# Altium PCB IPG_Rigid.PcbDoc (part 11 of 13)
Units mm, origin at the board's own origin, x right, y up, seen from the top; angles counter-clockwise.
Board outline 69.6 x 90.73 mm, 10 copper layers (TOP, DHOR, DVERT, GND 1, POWER, GND 2, GND 3, AVERT, AHOR, BOT), stack 1.198 mm thick; 745 components, 398 nets, 1997 pads, 2678 vias.
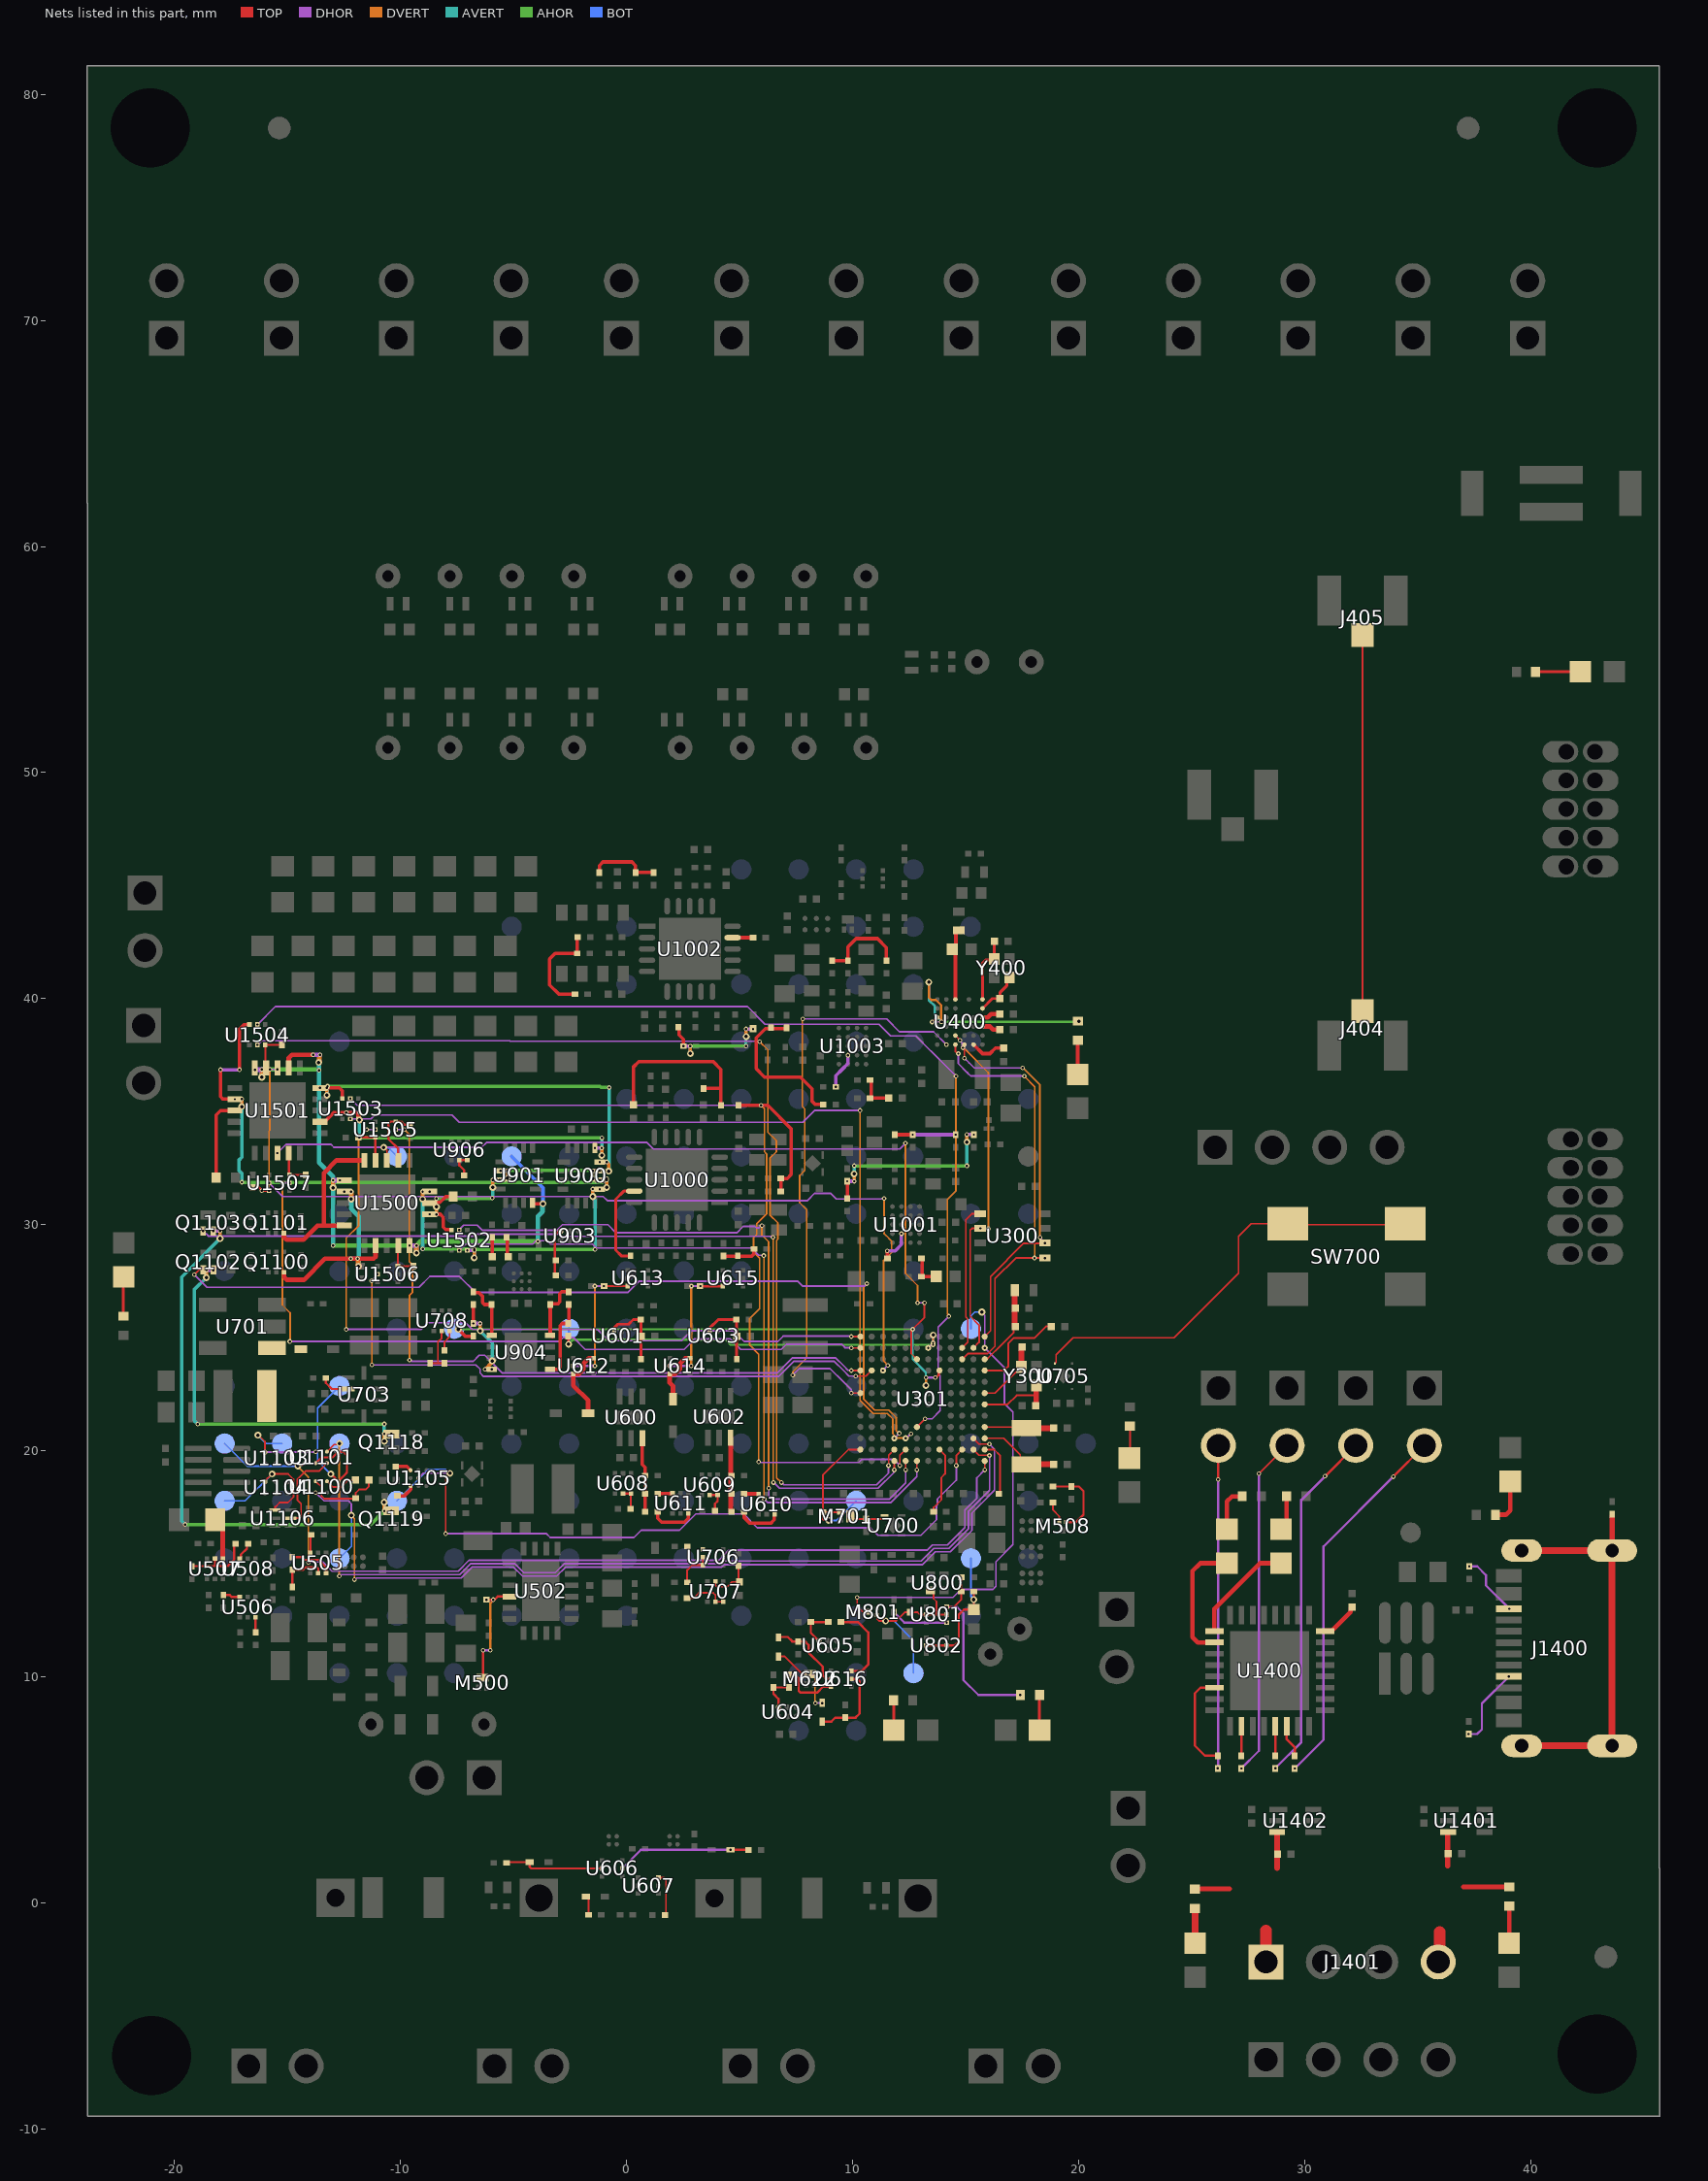
[diagram p15: the nets of this part, all layers, seen from the top]

## Via types
v1: diameter 0.203, hole 0.102, TOP to DHOR, tented top, 561 vias
v2: diameter 0.203, hole 0.102, DHOR to DVERT, tented top, 481 vias
v3: diameter 0.305/0.305/0.305/0.305/0.305/0.305 (per signal layer), hole 0.152, DVERT to AVERT, 397 vias
v4: diameter 0.305/0.305/0/0.305/0.305/0.305 (per signal layer), hole 0.152, DVERT to AVERT, tented top, 283 vias
v5: diameter 0.305/0.305/0.305/0.305/0/0.305/0.305/0.305/0.305/0.305 (per signal layer), hole 0.152, TOP to BOT, 259 vias
v6: diameter 0.305, hole 0.152, TOP to BOT, tented both sides, 169 vias
v7: diameter 0.305/0.305/0.305/0.305/0/0.305/0.305/0.305/0.305/0.305 (per signal layer), hole 0.152, TOP to BOT, tented both sides, 140 vias
v8: diameter 0.203, hole 0.102, AVERT to AHOR, tented top, 101 vias
v9: diameter 0.305/0.305/0.305/0.305/0.305/0.305 (per signal layer), hole 0.152, DVERT to AVERT, tented top, 79 vias
v10: diameter 0.305/0/0/0.305/0/0.305/0.305/0/0/0.305 (per signal layer), hole 0.152, TOP to BOT, tented both sides, 74 vias
v11: diameter 0.305/0.305/0.305/0.305/0.305/0.305/0.305/0.305/0.305/0.305 (per signal layer), hole 0.152, TOP to BOT, tented both sides, 66 vias
v12: diameter 0.203, hole 0.102, AHOR to BOT, tented both sides, 31 vias
v13: diameter 0.203, hole 0.102, DHOR to DVERT, tented both sides, 9 vias
v14: diameter 0.203/0.203 (per signal layer), hole 0.102, DHOR to DVERT, tented top, 7 vias
v15: diameter 0.203/0.203 (per signal layer), hole 0.102, TOP to DHOR, tented top, 7 vias
v16: diameter 0.203, hole 0.102, TOP to DHOR, tented both sides, 5 vias
v17: diameter 0.305, hole 0.152, DVERT to AVERT, tented both sides, 2 vias
v18: diameter 0.305/0.305/0/0.305/0.305/0.305 (per signal layer), hole 0.152, DVERT to AVERT, tented both sides, 2 vias
v19: diameter 0.305, hole 0.152, DVERT to AVERT, tented top, 2 vias
v20: diameter 0.305/0/0/0.305/0.305/0.305/0.305/0/0/0.305 (per signal layer), hole 0.152, TOP to BOT, tented both sides, 1 vias
v21: diameter 0.305/0.305/0/0.305/0.305/0.305 (per signal layer), hole 0.152, DVERT to AVERT, 1 vias
v22: diameter 0.203, hole 0.102, TOP to BOT, tented top, 1 vias

## Nets (pads, with @x,y where several pads share a name; then routed paths per layer and width w, separated by ;. In a path a pad name is that pad's centre, name@x,y a point inside that pad or via, vN(x,y) a via of type N, cw(c..) or ccw(c..) an arc to the next point about the centre after c; other vN are vias at no path point) (continued)
IMP_OUT+: R902.2 TP900.1 U301.J5 | length 24.8
  TOP w0.102: v1(13.666,23.242) 13.683,23.261 13.728,23.261 13.818,23.351 13.818,23.518 U301.J5@13.85,23.55
  TOP w0.152: v7@-7.434,25.366 -7.14,25.072 R902.2@-6.774,25.072
  DVERT w0.102: v4(13.245,22.886) 13.247,22.888 13.247,23.231 v2(13.249,23.232)
  AVERT w0.102: v8@12.663,25.374 12.663,24.053 13.245,23.47 v4(13.245,22.886)
  DHOR w0.102: v2(13.249,23.232) 13.254,23.237 13.66,23.237 v1(13.666,23.242)
  AHOR w0.102: v7(-7.442,25.375) 9.6,25.375 v8(12.663,25.375)
IMP_OUT-: R906.2 TP903.1 U301.L6 | length 18.5
  TOP w0.102: R906.2@-2.574,25.072 -2.574,24.722 v7(-2.565,24.714)
  DVERT w0.102: v2(13.565,24.771) 13.567,24.772 13.567,25.117 v4(13.569,25.119)
  AVERT w0.102: v8(13.564,24.689) 13.566,24.691 13.566,25.052 13.569,25.054 v4(13.569,25.119)
  DHOR w0.102: v1@13.35,24.55 13.563,24.763 v2@13.563,24.769
  AHOR w0.102: v7(-2.565,24.714) -2.361,24.919 4.384,24.919 4.614,24.689 9.6,24.689 v8(13.564,24.689)
  BOT w0.102: v7(-2.565,24.714) -2.569,24.718 -2.553,24.735 -2.553,25.387 TP903.1@-2.54,25.4
  other v1: 13.349,24.544
IMP_SINK: U900.11 U901.10 | length 5.7
  DVERT w0.152: v4(-5.266,32.054) v2(-5.266,32.385) ; v4(-1.487,32.045) v2(-1.487,32.376)
  AVERT w0.152: v4(-5.266,32.054) -5.255,32.066 v8(-5.255,32.41) ; v4@-1.488,32.046 v8(-1.489,32.38)
  DHOR w0.152: v1(-5.572,32.381) v1(-5.572,32.381) -5.27,32.383 v2@-5.268,32.385 ; v2@-1.486,32.376 -1.484,32.374 -1.184,32.374 v1(-1.182,32.372)
  AHOR w0.152: v8(-5.255,32.41) -1.533,32.41 -1.502,32.38 v8(-1.489,32.38)
IPG_SHDN: M701.1 R702.1 TP701.1 U301.B12 | length 6.7
  TOP w0.076: R702.1@8.685,17.272 8.685,16.973 8.729,16.928 8.948,16.928 v7(8.957,16.919) ; R702.1@8.687,17.275 8.687,18.92 9.817,20.05 U301.B12@10.35,20.05 ; R702.1@8.724,17.275 M701.1@9.46,17.275
  BOT w0.076: v7(8.957,16.919) 9.299,16.919 TP701.1@10.16,17.78 TP701.1@10.16,17.772
IREF1: Q1102.2 Q1118.3 | length 17
  DVERT w0.152: v4(-18.591,27.662) v2(-18.591,27.993) ; v4(-10.717,20.423) v2(-10.717,20.754)
  AVERT w0.152: v8(-18.974,21.178) -19.114,21.318 -19.114,27.139 v4(-18.591,27.662) ; v4@-10.718,20.424 v8(-10.719,21.184)
  DHOR w0.152: v2(-18.591,27.993) -18.588,27.991 -18.288,27.991 v1(-18.286,27.989) ; v2(-10.717,20.754) -10.714,20.752 -10.414,20.752 v1(-10.412,20.75)
  AHOR w0.152: v8(-18.974,21.178) -18.971,21.181 -10.722,21.181 v8(-10.719,21.184)
IREF2: Q1103.2 Q1119.3 | length 24.2
  DVERT w0.152: v4(-17.985,29.389) v2(-17.985,29.72) ; v4(-10.723,17.721) -10.72,17.718 -10.72,17.344 v2(-10.717,17.341)
  AVERT w0.152: v8(-19.533,16.739) -19.685,16.891 -19.685,27.689 v4(-17.985,29.389) ; v4(-10.723,17.721) -10.719,17.717 -10.719,17.346 v8(-10.715,17.342)
  DHOR w0.152: v1(-18.29,29.716) -18.288,29.718 -17.988,29.718 v2(-17.985,29.72) ; v2(-10.717,17.341) -10.714,17.343 -10.414,17.343 v1(-10.412,17.345)
  AHOR w0.152: v8(-19.533,16.739) -11.318,16.739 v8(-10.715,17.342)
MAG_DET: M801.3 TP802.1 U301.L1 | length 21.5
  TOP w0.076: v1(10.21,13.513) 10.21,13.107 10.439,12.878 M801.3@10.719,12.878
  DHOR w0.076: v1(10.21,13.513) 14.445,13.513 14.794,13.862 16.205,13.862 16.346,14.003 16.346,15.089 17.101,15.844 17.101,21.705 16.725,22.081 16.725,23.675 v1(15.85,24.55) 15.85,25.8 15.85,25.978 15.723,26.105 v7(15.723,26.137)
  BOT w0.076: TP802.1@15.24,25.4 15.24,25.8 15.24,25.964 15.413,26.137 v7(15.723,26.137)
MAG_OUT: R803.1 R804.1 R805.2 U801.3 | length 8.4
  TOP w0.076: U801.3@14.166,13.101 14.498,13.101 14.808,13.411 R804.1@14.808,14.402
  DHOR w0.102: v1(14.17,13.082) 14.63,13.082 14.91,12.802 14.91,9.855 15.57,9.195 v1(17.424,9.195)
MAG_OUTn: M801.1 R801.2 TP801.1 U800.3 U801.2 U801.5 | length 7.7
  TOP w0.076: M801.1@11.089,12.728 11.089,12.561 11.179,12.471 11.933,12.471 12.314,12.852 R801.2@12.522,12.852 12.523,12.851 12.776,12.851 12.777,12.852 12.878,12.852 12.979,12.751 U801.5@13.266,12.751 13.716,12.751 ; U800.3@13.446,13.828 13.449,13.828 13.586,13.691 13.586,13.458 13.716,13.328 13.716,12.751 ; U801.2@14.166,12.751 13.716,12.751
  BOT w0.076: v7(11.469,12.471) 11.836,12.471 12.7,11.608 TP801.1@12.7,10.16
MUX_ENn: TP1502.1 U301.K7 U1500.18 U1501.18 | length 40.1
  TOP w0.076: v7@-10.744,33.426 v7(-10.742,33.424) -10.6,33.282 U1500.18@-10.6,32.848 ; U301.K7@12.85,24.05 12.601,24.299 12.601,25.312 13.183,25.894 v1(13.183,26.539)
  DVERT w0.076: v2(12.344,33.604) 12.344,27.842 12.878,27.308 v2(12.878,26.543)
  DHOR w0.076: v1(-15.443,33.167) -15.054,33.556 -13.082,33.556 -12.95,33.424 v7(-10.742,33.424) -6.405,33.424 -6.192,33.637 0.907,33.637 1.191,33.353 12.093,33.353 v2(12.344,33.604) ; v2(12.878,26.543) 12.88,26.541 13.181,26.541 v1(13.183,26.539)
  BOT w0.076: v7(-10.742,33.424) -10.724,33.407 -10.547,33.407 TP1502.1@-10.16,33.02
NetA400_1: 
NetC300_2: C300.2 U301.G1 Y300.1 | length 3
  TOP w0.076: U301.G1@15.85,22.55 16.305,22.55 16.6,22.845 17.255,23.5 17.28,23.5 17.465,23.685 Y300.1@17.465,23.71 Y300.1@17.47,23.715
  TOP w0.254: Y300.1@17.47,23.715 C300.2@17.47,24.6
NetC301_1: C301.1 U301.F1 Y300.3 | length 3.2
  TOP w0.076: U301.F1@15.85,22.05 16.861,22.05 17.261,22.45 18.13,22.45
  TOP w0.254: C301.1@18.13,22 18.13,22.45 Y300.3@18.13,22.799
NetC305_2: C305.2 U301.D1 Y301.2 | length 3
  TOP w0.076: U301.D1@15.85,21.05 16.6,21.05 17.65,21.05 Y301.2@17.7,21
  TOP w0.254: Y301.2@17.7,21 C305.2@18.87,21
NetC306_2: C306.2 U301.C1 Y301.1 | length 3.6
  TOP w0.076: U301.C1@15.85,20.55 16.6,20.55 16.686,20.55 17.417,19.82 17.417,19.683 Y301.1@17.7,19.4
  TOP w0.254: Y301.1@17.7,19.4 C306.2@18.87,19.4
NetC311_2: C311.2 U301.J1 | length 4.4
  TOP w0.076: U301.J1@15.85,23.55 16.367,23.55 16.6,23.55 16.712,23.55 16.888,23.726 16.888,24.738 17.14,24.99 18.056,24.99 18.566,25.5 C311.2@18.8,25.5
NetC317_1: C317.1 C318.2 L301.2 U301.K1 | length 3.8
  TOP w0.076: U301.K1@15.85,24.05 15.89,24.09 15.99,24.09 16.6,24.7 17.135,25.235 17.135,25.465 C318.2@17.17,25.5 ; L301.2@17.17,27.065 L301.2@17.205,27.1 ; L301.2@17.17,27.065 L301.2@17.205,27.1 ; L301.2@17.17,27.065 L301.2@17.205,27.1
  TOP w0.254: C318.2@17.17,25.5 17.17,26.3 L301.2@17.17,27.065
NetC400_1: C400.1 U400.A1 Y400.1 | length 3
  TOP w0.127: U400.A1@15.753,39.968 15.753,41.573 15.89,41.711 16.226,41.711 Y400.1@16.277,41.761 16.277,42.461 C400.1@16.31,42.494
NetC401_2: C401.2 L400.1 U400.E1 | length 3.2
  TOP w0.084: C401.2@14.553,42.045 C401.2@14.409,42.189 C401.2@14.572,42.352 ; L400.1@14.572,42.886 14.705,43.019 L400.1@14.707,43.019
  TOP w0.17: U400.E1@14.553,39.968 14.553,40.208 C401.2@14.553,42.045 ; C401.2@14.572,42.352 L400.1@14.572,42.886
NetC403_1: C403.1 U400.A2 Y400.3 | length 2.1
  TOP w0.127: U400.A2@15.753,39.568 16.19,40.005 C403.1@16.52,40.005 16.537,40.022 16.537,40.281 16.821,40.565 16.821,40.815 Y400.3@16.947,40.941
NetC408_2: C408.2 U400.B6 | length 1.6
  TOP w0.152: U400.B6@15.353,37.968 15.753,37.568 16.079,37.568 16.327,37.816 C408.2@16.688,37.816
NetC409_2: C409.2 U400.A3 | length 0.8
  TOP w0.203: U400.A3@15.753,39.168 15.976,39.168 16.128,39.319 C409.2@16.52,39.319
NetC410_1: C410.1 U400.A4 | length 0.9
  TOP w0.203: U400.A4@15.753,38.768 U400.A4@15.825,38.768 ; U400.A4@15.776,38.768 15.983,38.768 16.08,38.768 16.215,38.633 C410.1@16.52,38.633
NetC602_2: C602.2 R607.1 R610.2 U601.A2 | length 3.3
  TOP w0.076: R607.1@0.635,24.054 R607.1@0.635,24.105
  TOP w0.127: U601.A2@-0.552,25.262 -0.552,25.423 -0.375,25.6 0.091,25.6 0.297,25.806 R610.2@0.634,25.806 0.635,25.069 R607.1@0.635,24.105
NetC605_2: C605.2 R621.1 R622.2 U603.A2 | length 3.3
  TOP w0.076: R621.1@4.797,24.058 R621.1@4.797,24.108
  TOP w0.127: U603.A2@3.681,25.262 3.681,25.423 4.064,25.806 4.867,25.806 4.867,25.069 R621.1@4.867,24.105
NetC709_2: C709.2 R710.2 U707.2 | length 2.1
  TOP w0.076: U707.2@3.933,14.217 3.933,14.041 3.978,13.997 4.472,13.997 4.674,14.199 C709.2@4.999,14.199 4.999,14.317 4.957,14.317 4.953,14.32 R710.2@4.953,14.911
NetC904_2: C904.2 R909.1 | length 0.9
  TOP w0.152: C904.2@-5.944,28.575 R909.1@-5.944,29.438
NetC905_2: C905.2 R911.1 | length 0.9
  TOP w0.152: R911.1@-5.309,29.438 -5.268,29.398 -5.268,28.616 C905.2@-5.228,28.575
NetC1011_1: C1011.1 R1025.2 R1026.1 | length 8.1
  TOP w0.152: C1011.1@0.301,35.32 0.301,36.97 0.542,37.211 3.84,37.211 4.18,36.872 4.18,36.025 ; R1025.2@3.404,36.025 4.18,36.025 ; R1026.1@4.18,35.315 4.18,35.325 4.18,36.025
NetC1012_2: C1012.2 R1023.2 R1024.1 | length 1.5
  TOP w0.152: R1024.1@13.079,28.491 R1024.1@13.092,28.479 ; C1012.2@13.697,27.704 13.092,27.704 R1024.1@13.092,28.479 ; R1024.1@13.067,28.504 R1024.1@13.092,28.479 ; R1024.1@13.067,28.504 R1024.1@13.092,28.479 ; R1024.1@13.067,28.504 R1024.1@13.092,28.479
NetC1026_2: C1026.2 R1054.2 R1055.1 | length 1.6
  TOP w0.152: R1055.1@10.825,36.4 10.825,35.6 11.57,35.6 C1026.2@11.6,35.6
NetC1027_1: C1027.1 R1056.2 R1057.1 | length 5.4
  TOP w0.152: R1057.1@2.3,38.734 2.322,38.712 2.322,38.394 2.52,38.196 v1(2.52,37.9)
  DVERT w0.152: v4(2.825,37.573) v2(2.825,37.904) ; v4(5.295,38.328) v2(5.295,38.659)
  AVERT w0.152: v4(2.825,37.573) 2.827,37.575 2.827,37.901 v8(2.829,37.903) ; v8(5.295,37.897) v4(5.295,38.328)
  DHOR w0.152: v1(2.52,37.9) 2.522,37.902 v2@2.822,37.902 ; v2(5.295,38.659) 5.298,38.657 5.598,38.657 v1(5.6,38.655)
  AHOR w0.152: v8(2.829,37.903) 2.833,37.9 5.292,37.9 v8(5.295,37.897)
NetC1402_2: C1402.2 U1400.16 | length 1.7
  TOP w0.2: U1400.16@30.912,12.02 30.939,12.047 31.227,12.047 32.046,12.866 32.046,13.026 C1402.2@32.106,13.086
NetC1404_1: C1404.1 J1401.4 R1407.1 U1401.3 | length 4.9
  TOP w0.2: U1401.3@36.335,3.107 U1401.3@36.36,3.132 ; 37.033,0.704 R1407.1@39.056,0.704
  TOP w0.254: 36.335,1.639 U1401.3@36.335,3.107
  TOP w0.5: J1401.4@35.979,-2.68 35.979,-1.283
NetC1406_2: C1406.2 J1401.1 R1408.1 U1402.3 | length 4.5
  TOP w0.2: R1408.1@25.156,0.603 R1408.1@25.172,0.619 ; R1408.1@25.188,0.635 R1408.1@25.172,0.619 ; 26.695,0.619 R1408.1@25.172,0.619
  TOP w0.254: 28.78,1.548 U1402.3@28.78,3.129
  TOP w0.5: J1401.1@28.296,-2.616 28.296,-1.219
NetD400_A: D401.A R401.1 | length 2
  TOP w0.127: R401.1@40.227,54.458 D401.A@42.201,54.458
NetD401_A: D402.A R402.2 | length 1.5
  TOP w0.152: D402.A@19.964,36.654 R402.2@19.964,38.158
NetD600_2: D600.2 U612.3 U612.6 | length 3.5
  TOP w0.076: D600.2@-1.698,21.666 -1.523,21.666 D600.2@-1.503,21.686
  TOP w0.203: D600.2@-1.698,21.666 -1.698,22.221 -2.355,22.878 U612.3@-2.355,23.399 -2.353,23.397 -2.126,23.397 -1.905,23.618 -1.905,23.866 -1.672,24.099 U612.6@-1.455,24.099
NetD601_2: D601.2 R609.2 U606.5 | length 4.5
  TOP w0.1: R609.2@-5.31,1.767 -5.274,1.803 D601.2@-4.281,1.803 -4.281,1.583 -4.222,1.524 U606.5@-1.085,1.524
NetD602_2: D602.2 U614.3 U614.6 | length 2.5
  TOP w0.203: D602.2@2.057,22.28 2.057,22.866 1.912,23.011 U614.3@1.912,23.399 1.914,23.397 2.141,23.397 2.362,23.618 2.362,23.866 2.595,24.099 U614.6@2.812,24.099
NetD603_2: D603.2 R615.2 U606.2 | length 6.1
  TOP w0.1: D603.2@4.608,2.341 5.305,2.341 5.361,2.285 5.396,2.32 R615.2@5.396,2.337 R615.2@5.331,2.403
  DHOR w0.1: v1(-0.185,1.524) 0.635,2.344 v1(4.608,2.344)
NetD604_1: D604.1 R623.1 | length 0.9
  TOP w0.102: D604.1@-1.792,0.279 -1.754,0.279 -1.68,0.205 R623.1@-1.68,-0.529
NetD605_1: D605.1 D606.1 M622.3 | length 3.7
  TOP w0.076: D606.1@6.73,10.899 7.008,10.899 7.787,10.12 M622.3@8.049,10.12 ; v1(8.038,10.13) M622.3@8.049,10.12 ; M622.3@8.128,10.12 M622.3@8.049,10.12 ; v1(8.661,8.839) D605.1@8.661,8.859
  DVERT w0.076: v2(8.356,8.838) 8.336,8.859 8.336,10.055 8.37,10.09 v2(8.37,10.124)
  DHOR w0.076: v1(8.038,10.13) 8.041,10.127 8.367,10.127 v2(8.37,10.124) ; v2(8.356,8.838) v1(8.661,8.839)
NetD605_2: D605.2 R625.2 U616.5 | length 3.6
  TOP w0.076: U616.5@9.95,9.912 10.05,9.912
  TOP w0.102: D605.2@8.661,8.019 9.061,8.019 9.236,8.195 R625.2@9.677,8.195 10.135,8.195 10.312,8.373 10.312,9.804 10.204,9.912 10.05,9.912
NetD606_2: D606.2 R628.2 U616.2 | length 3.5
  TOP w0.102: D606.2@6.73,11.739 6.752,11.76 7.137,11.76 7.335,11.563 R628.2@7.597,11.563 7.897,11.563 8.052,11.408 8.052,11.074 8.687,10.439 8.687,10.046 8.789,9.944 8.821,9.912 U616.2@9.05,9.912
NetD700_2: D700.2 L700.2 U701.1
NetD701_A: D704.A R714.2 | length 1.3
  TOP w0.127: D704.A@11.818,7.645 R714.2@11.818,8.966
NetD702_A: D705.A R715.1 | length 1.7
  TOP w0.127: R715.1@-22.258,25.952 D705.A@-22.258,27.691
NetD704_A: D301.A R304.1 | length 1.4
  TOP w0.076: D301.A@22.28,19.7 R304.1@22.28,21.093
NetD802_A: D802.A R805.1 | length 1.5
  TOP w0.127: D802.A@18.274,7.647 R805.1@18.274,9.195
NetD1400_A: D1400.A R1400.2 | length 2
  TOP w0.203: R1400.2@38.449,17.17 38.913,17.17 39.106,17.364 D1400.A@39.106,18.642
NetD1401_A: D1401.A R1407.2 | length 1.6
  TOP w0.2: D1401.A@39.056,-1.786 R1407.2@39.056,-0.146
NetD1402_A: D1402.A R1408.2 | length 1.5
  TOP w0.3: D1402.A@25.156,-1.786 R1408.2@25.156,-0.247
NetD1404_A: D1404.A R1403.1 | length 1.6
  TOP w0.2: D1404.A@28.956,16.523 29.21,16.777 R1403.1@29.21,17.988
NetD1404_K: D1404.K U1400.25 | length 4.8
  TOP w0.2: U1400.25@26.01,12.02 26.01,13.005 28.028,15.023 D1404.K@28.956,15.023
NetD1405_A: D1405.A R1411.1 | length 2
  TOP w0.2: D1405.A@26.568,16.523 26.568,17.76 26.792,17.983 27.238,17.983 R1411.1@27.242,17.988
NetD1405_K: D1405.K U1400.26 | length 5.7
  TOP w0.2: U1400.26@26.01,11.52 25.285,11.52 25.044,11.76 25.044,14.681 25.387,15.023 D1405.K@26.568,15.023
NetJ404_1: J404.1 J405.1 | length 16.6
  TOP w0.084: J404.1@32.563,39.447 J405.1@32.563,56.087
NetJ1400_1: J1400.1 J1400.2 J1400.3 J1400.4 R1410.1 | length 18.2
  TOP w0.25: J1400.4@43.612,15.585 R1410.1@43.612,17.11
  TOP w0.3: J1400.1@39.612,6.945 J1400.3@43.612,6.945 J1400.4@43.612,15.585 43.546,15.585 43.536,15.596 43.525,15.585 J1400.2@39.612,15.585
NetJ1400_A5: J1400.A5 R1405.1 | length 3.5
  TOP w0.102: v1(39.037,10.008) J1400.A5@39.037,10.013
  DHOR w0.102: v1(37.262,7.467) 37.638,7.467 37.846,7.675 37.846,8.816 v1(39.037,10.008)
NetJ1400_B5: J1400.B5 R1409.1 | length 2.9
  TOP w0.2: J1400.B5@39.037,13.013 39.057,13.013 v1(39.065,13.005)
  DHOR w0.102: v1(37.287,14.885) 37.642,14.885 38.024,14.503 38.024,14.046 v1(39.065,13.005)
NetJP1400_2: JP1400.2 R1401.1 | length 15.1
  TOP w0.102: v1(27.982,18.987) JP1400.2@29.227,20.231
  DHOR w0.102: v1(27.203,5.947) 27.982,6.725 v1(27.982,18.987)
NetJP1401_2: JP1401.2 R1404.1 | length 15.8
  TOP w0.102: R1404.1@28.702,5.947 28.702,5.96 28.706,5.965 v1(28.706,5.955) ; v1(30.91,18.874) JP1401.2@32.266,20.231
  DHOR w0.102: v1(28.706,5.955) 29.855,7.103 29.855,17.82 v1(30.91,18.874)
NetJP1402_2: JP1402.2 R1402.1 | length 14.3
  TOP w0.102: v1(26.175,18.732) 26.181,18.739 26.181,20.225 JP1402.2@26.187,20.231
  DHOR w0.102: v1(26.162,5.947) 26.175,5.96 v1(26.175,18.732)
NetJP1403_2: JP1403.2 R1406.1 | length 16.7
  TOP w0.102: R1406.1@29.566,5.947 29.566,5.938 v1(29.573,5.946) ; v1(33.926,18.851) JP1403.2@35.306,20.231
  DHOR w0.102: v1(29.573,5.946) 30.836,7.208 30.836,15.761 v1(33.926,18.851)
NetM500_3: M500.3 R522.2 U502.4 | length 5.2
  TOP w0.102: M500.3@-6.375,9.961 -6.35,9.987 v1(-6.35,11.176) ; v1(-6.197,13.411) -5.84,13.411 -5.701,13.55 U502.4@-5.175,13.55
  DVERT w0.102: v2(-6.02,11.176) -6.02,13.258 -5.893,13.385 v2@-5.893,13.411
  DHOR w0.102: v1(-6.35,11.176) v2(-6.02,11.176) ; v1(-6.197,13.411) v2@-5.893,13.411
  other v2: -5.891,13.411
NetM508_1: M508.1 R515.2 R517.1 | length 3.4
  TOP w0.1: R515.2@18.873,18.415 R517.1@19.685,18.416 20.015,18.415 20.218,18.212 20.218,17.17 19.892,16.844 M508.1@19.449,16.844
NetM508_2: M508.2 R516.1 | length 1
  TOP w0.076: R516.1@18.873,17.704 18.873,17.373 19.149,17.096 M508.2@19.149,16.844
NetM701_3: M701.3 R700.1 U700.3 | length 1.5
  TOP w0.102: M701.3@9.905,17.1 10.025,16.98 R700.1@10.6,16.98 11.362,16.98
NetR301_2: R301.2 U301.B5 | length 3.1
  TOP w0.076: R301.2@13.588,17.297 13.588,17.49 13.931,17.833 13.931,18.8 13.931,18.813 14.099,18.981 14.099,19.801 U301.B5@13.85,20.05
NetR302_1: R302.1 U301.B1 | length 2.5
  TOP w0.076: U301.B1@15.85,20.05 16.272,20.05 16.525,19.797 16.525,18.8 R302.1@16.525,18.1
NetR403_1: R402.1 U400.G3 | length 10.8
  TOP w0.076: v1(13.523,38.968) 13.723,39.168 U400.G3@13.752,39.168
  DVERT w0.102: v18(13.378,40.733) 13.378,40.048 13.478,39.948 13.683,39.948 13.917,39.714 13.917,39.247 v2(13.917,38.972)
  AVERT w0.102: v18(13.378,40.733) 13.378,39.937 13.647,39.668 13.647,39.296 v8(13.966,38.977)
  DHOR w0.076: v1@13.527,38.972 v2(13.917,38.972)
  AHOR w0.102: v8(13.966,38.977) v7@19.978,38.977
  other v7: 20.015,38.989
NetR500_2: R500.2 R504.1 U505.5 | length 2.2
  TOP w0.1: R504.1@-14.783,14.731 -14.324,14.731 -14.216,14.839 -13.698,14.839 -13.64,14.781 U505.5@-13.64,14.587
  TOP w0.102: R500.2@-14.783,13.971 R504.1@-14.783,14.731
NetR501_2: R501.2 R507.1 U507.5 | length 3.1
  TOP w0.102: R501.2@-19.228,14.891 -19.228,14.896 -18.212,14.896 ; U507.5@-18.212,15.233 -18.212,14.896 ; R507.1@-17.294,15.951 -17.358,15.887 -17.358,15.184 -17.647,14.896 -18.212,14.896
NetR502_2: R502.2 U507.4 | length 1.8
  TOP w0.102: R502.2@-18.199,16.942 R502.2@-17.862,16.604
  TOP w0.203: U507.4@-17.862,15.233 R502.2@-17.862,16.604
NetR503_2: R503.2 U506.3 | length 0.7
  TOP w0.102: R503.2@-17.831,13.615 -17.553,13.615 -17.476,13.538 U506.3@-17.117,13.538
NetR504_2: R504.2 U505.6 | length 2
  TOP w0.102: R504.2@-14.783,15.291 -14.773,15.291 -14.715,15.233 -14.715,15.284 -14.709,15.291 -14.364,15.291 -14.246,15.173 -13.624,15.173 -13.29,14.839 U505.6@-13.29,14.587
NetR505_2: R505.2 U506.6 | length 0.7
  TOP w0.102: U506.6@-16.417,12.638 -16.417,11.972 R505.2@-16.408,11.964
NetR506_1: R506.1 U505.3 | length 0.7
  TOP w0.102: U505.3@-13.99,15.487 -13.98,15.496 -13.98,16.17 R506.1@-13.971,16.18
NetR507_2: R507.2 U508.6 | length 0.8
  TOP w0.076: R507.2@-16.764,15.861 R507.2@-16.734,15.891
  TOP w0.102: U508.6@-17.114,15.233 -17.114,15.235 -17.067,15.282 -17.067,15.398 -16.792,15.673 -16.792,15.834 R507.2@-16.764,15.861
NetR600_2: R600.2 U608.5 U608.6 | length 1.1
  TOP w0.102: U608.5@-0.125,18.123 -0.125,18.121 -0.104,18.1 U608.6@0.197,18.1 ; U608.6@0.193,18.096 0.193,17.459 R600.2@0.227,17.425
  TOP w0.127: U608.5@-0.153,18.1 -0.148,18.1 U608.5@-0.125,18.123
NetR602_2: R602.2 U612.2 U613.3 | length 5.8
  TOP w0.102: R602.2@-0.88,27.285 U613.3@0.058,27.285
  DVERT w0.102: v2(-1.4,23.749) -1.398,23.751 -1.398,27.281 v2(-1.396,27.283)
  DHOR w0.102: v1(-2.355,23.749) v2(-1.4,23.749) ; v2(-1.396,27.283) -1.395,27.284 -0.996,27.284 v1(-0.995,27.285)
NetR604_1: R604.1 R605.1 R606.1 U600.6 | length 3.3
  TOP w0.152: U600.6@0.7,20.55 0.7,19.391 0.82,19.271 R604.1@0.82,18.9 R606.1@0.82,18.1 R605.1@0.82,17.3
NetR605_2: R605.2 U611.3 | length 2
  TOP w0.152: R605.2@1.38,17.3 1.38,17.01 1.549,16.84 2.561,16.84 2.734,17.013 2.734,17.225 U611.3@2.738,17.228
NetR606_2: R606.2 U611.6 | length 0.7
  TOP w0.152: R606.2@1.387,18.107 2.017,18.107 U611.6@2.038,18.128
NetR611_2: R611.2 U609.5 U609.6 | length 1.1
  TOP w0.102: U609.5@3.705,18.041 U609.6@4.033,18.041 4.033,17.774 3.912,17.654 R611.2@3.912,17.348
  TOP w0.152: U609.5@3.683,18.041 U609.5@3.705,18.041
NetR613_2: R613.2 U614.2 U615.3 | length 5.8
  TOP w0.102: R613.2@3.365,27.279 U615.3@4.303,27.279
  DVERT w0.102: v2(2.867,23.749) 2.869,23.751 2.869,27.281 v2(2.872,27.283)
  DHOR w0.102: v1(1.912,23.749) v2(2.867,23.749) ; v2(2.872,27.283) 2.873,27.284 3.272,27.284 v1(3.273,27.285)
NetR617_1: R617.1 R618.1 R619.1 U602.6 | length 3.3
  TOP w0.2: U602.6@4.6,20.575 4.61,20.565 4.61,17.31 R618.1@4.62,17.3
NetR618_2: R618.2 U610.3 | length 2
  TOP w0.152: R618.2@5.18,17.3 5.212,17.268 5.212,17.043 5.465,16.789 6.379,16.789 6.532,16.942 6.532,17.173 U610.3@6.551,17.192
NetR619_2: R619.2 U610.6 | length 0.7
  TOP w0.152: R619.2@5.18,18.1 5.184,18.096 5.847,18.096 U610.6@5.851,18.092
NetR620_1: R620.1 U607.6 | length 1.9
  TOP w0.076: U607.6@1.415,1.112 1.657,1.112 1.749,1.021 1.749,-0.487 R620.1@1.702,-0.533
NetR626_1: R626.1 U616.3 | length 2.7
  TOP w0.102: R626.1@7.217,10.12 R626.1@7.188,10.091 7.461,10.091 7.518,10.033 7.62,9.931 7.62,9.386 7.709,9.296 8.433,9.296 8.699,9.562 U616.3@9.05,9.562
NetR626_2: R626.2 R627.1 U604.C1 | length 1.7
  TOP w0.102: U604.C1@6.73,8.645 6.73,9.018 6.502,9.246 R627.1@6.502,9.531 R626.2@7.188,9.531
NetR629_1: R629.1 U616.6 | length 3.8
  TOP w0.102: R629.1@9.601,12.421 9.487,12.421 R629.1@9.484,12.423 10.233,12.423 10.693,11.963 10.693,10.541 10.414,10.262 U616.6@9.95,10.262
NetR629_2: R629.2 R630.1 U605.C1 | length 1.8
  TOP w0.076: U605.C1@8.48,11.582 U605.C1@8.515,11.582
  TOP w0.102: U605.C1@8.48,11.582 8.48,11.618 8.154,11.944 R630.1@8.154,12.423 R629.2@8.924,12.423
NetR701_2: R701.2 U706.4
NetR703_2: R703.2 R705.1 U708.5 | length 2.1
  TOP w0.076: R703.2@-8.687,23.875 -8.341,23.875 ; U708.5@-8.179,25.306 -8.179,24.981 -8.341,24.819 -8.341,23.875 ; R705.1@-8.051,23.875 -8.341,23.875
NetR704_2: R704.2 U706.5 U706.6 | length 1.7
  TOP w0.076: R704.2@2.686,14.175 2.686,14.719 2.908,14.941 U706.6@3.383,14.941 U706.5@3.383,15.291
NetR705_2: R705.2 U708.6 | length 1
  TOP w0.076: R705.2@-8.051,24.435 -8.051,24.816 -7.829,25.038 U708.6@-7.829,25.306
NetR709_2: R709.2 U707.5 U707.6 | length 2
  TOP w0.076: R709.2@2.68,13.48 2.965,13.48 3.2,13.716 3.835,13.716 3.933,13.618 U707.5@3.933,13.317 U707.6@4.283,13.317
NetR711_1: R711.1 U703.7 | length 1.3
  TOP w0.1: R711.1@-13.301,23.218 -13.301,23.001 -13.034,22.734 U703.7@-12.316,22.734
NetR800_2: R800.2 U801.1 | length 2.5
  DHOR w0.102: v1(11.836,12.852) 12.287,12.401 v1(14.166,12.401)
NetR900_2: R900.2 R901.1 U904.1 | length 2.5
  TOP w0.152: R901.1@-6.774,27.032 -6.732,26.99 -6.527,26.99 -6.374,26.837 -6.374,26.558 -6.284,26.469 -6.022,26.469 -5.966,26.412 -5.959,26.412 U904.1@-5.959,25.102
NetR901_2: R901.2 R902.1 U904.4 | length 3.7
  TOP w0.152: R902.1@-6.774,25.677 R901.2@-6.774,26.427
  DVERT w0.152: v4(-6.471,25.303) v2(-6.471,25.634) ; v2(-6.262,23.6) -5.97,23.892 -5.97,23.948 v4(-5.941,23.977)
  AVERT w0.152: v4(-6.471,25.303) -5.941,24.774 v4(-5.941,23.977)
  DHOR w0.152: v1(-6.776,25.63) v1(-6.776,25.63) -6.474,25.632 v2@-6.472,25.634 ; v2(-6.262,23.6) -6.258,23.602 -5.959,23.602 v1(-5.957,23.604)
NetR906_1: R906.1 R908.2 U904.5 | length 3.6
  TOP w0.076: R906.1@-2.574,25.632 R906.1@-2.552,25.654
  TOP w0.152: U904.5@-3.389,23.602 -3.38,23.611 -3.029,23.611 -2.94,23.7 -2.94,25.53 -2.838,25.632 R906.1@-2.574,25.632 ; R906.1@-2.552,25.654 R908.2@-2.552,26.472
NetR907_2: R907.2 R908.1 U904.8 | length 3
  TOP w0.152: R908.1@-2.574,27.032 -2.603,27.032 -2.861,27.032 -2.948,26.945 -2.948,26.588 -3.044,26.492 -3.374,26.492 -3.374,26.427 U904.8@-3.374,25.152 ; U904.8@-3.374,25.152 U904.8@-3.274,25.052 ; U904.8@-3.374,25.152 U904.8@-3.274,25.052 ; U904.8@-3.374,25.152 U904.8@-3.274,25.052
NetR913_1: R913.1 R914.1 U903.C1 | length 2.2
  TOP w0.102: R913.1@-3.129,27.762 -3.175,27.808 -3.175,28.377 R914.1@-3.129,28.423 -3.172,28.465 -3.172,29.547 -3.007,29.712 U903.C1@-2.915,29.712
NetR915_2: R915.2 U906.5 U906.6 | length 1.1
  TOP w0.102: R915.2@-7.185,32.182 -7.185,32.411 -7.395,32.62 U906.5@-7.395,32.849 U906.6@-7.045,32.849
NetR1002_1: R1002.1 R1005.2 R1007.2 | length 1.5
  TOP w0.152: R1002.1@4.296,28.613 5.549,28.613 5.638,28.703 R1005.2@5.638,28.843
NetR1004_2: R1004.2 R1006.2 R1009.1 | length 8.5
  TOP w0.152: R1004.2@9.767,31.161 9.767,31.127 9.779,31.115 9.779,31.911 v1(9.767,31.924)
  DVERT w0.152: v2(10.072,31.92) v4(10.072,32.251) ; v4(15.062,33.657) v2(15.062,33.988)
  AVERT w0.152: v4(10.072,32.251) 10.073,32.252 10.073,32.607 v8(10.074,32.608) ; v4(15.062,33.657) 15.063,33.655 v8(15.065,32.605) v8(15.065,32.605)
  DHOR w0.152: v1(9.767,31.924) 9.769,31.922 10.068,31.922 v2(10.072,31.92) ; v2(15.062,33.988) 15.065,33.986 15.365,33.986 v1(15.367,33.984)
  AHOR w0.152: v8(10.074,32.608) 10.075,32.607 v8(15.065,32.605) v8(15.065,32.605)
NetR1013_1: R1013.1 U1001.B2 | length 1.6
  TOP w0.152: v1(11.543,28.846) 11.545,28.844 11.545,28.506 R1013.1@11.547,28.504
  DHOR w0.152: v1(11.543,28.846) 11.889,28.846 12.167,29.124 v1(12.167,29.604)
NetR1014_1: R1014.1 U1000.14 | length 4
  TOP w0.127: R1014.1@0.178,28.625 -0.233,28.625 -0.48,28.873 -0.48,31.123 -0.117,31.487 U1000.14@0.342,31.487
NetR1016_2: R1016.2 R1017.2 R1021.1 | length 5.9
  TOP w0.152: R1021.1@4.96,35.28 6.254,35.28 7.29,34.244 7.29,32.225 7.111,32.046 R1016.2@6.827,32.046 R1017.2@6.827,31.465
NetR1019_2: R1019.2 R1020.2 R1022.1 | length 2.7
  TOP w0.152: R1020.2@11.867,33.984 v1(12.667,33.984)
  DHOR w0.152: v1(12.667,33.984) v1(14.567,33.984)
NetR1034_1: R1034.1 R1036.2 R1038.2 | length 3.1
  TOP w0.152: R1036.2@-1.2,45.625 -1.2,45.888 -1.038,46.05 0.245,46.05 0.4,45.895 R1038.2@0.4,45.625 ; R1038.2@0.4,45.58 R1034.1@1.2,45.58
NetR1035_1: R1035.1 R1037.2 R1040.2 | length 6.8
  TOP w0.152: R1040.2@7.073,38.675 6.145,38.675 5.74,38.27 5.74,36.906 6.112,36.534 7.687,36.534 8.204,36.017 8.204,35.462 8.346,35.319 R1035.1@8.653,35.319
NetR1044_1: R1044.1 U1003.B2 | length 1.6
  DHOR w0.152: v1(9.258,36.1) 9.258,36.589 9.549,36.88 9.8,37.131 v1(9.8,37.5)
NetR1045_1: R1045.1 U1002.14 | length 0.9
  TOP w0.152: U1002.14@4.691,42.7 R1045.1@5.551,42.7
NetR1048_2: R1048.2 R1049.2 R1052.1 | length 4.5
  TOP w0.152: R1052.1@-2.28,40.2 -2.287,40.207 -2.999,40.207 -3.404,40.612 -3.404,41.754 -3.158,42 R1048.2@-2.225,42 ; R1048.2@-2.18,42 -2.18,42.609 -2.178,42.612 -2.178,42.721 -2.176,42.723 R1049.2@-2.16,42.723
NetR1050_2: R1050.2 R1051.2 R1053.1 | length 3.9
  TOP w0.152: R1051.2@9.1,41.68 R1050.2@9.8,41.68 ; R1050.2@9.8,41.725 9.8,42.289 10.168,42.657 11.107,42.657 11.5,42.265 R1053.1@11.5,41.68
NetR1148_1: R1148.1 U1105.C1 | length 0.7
  TOP w0.102: U1105.C1@-9.552,19.139 U1105.C1@-9.552,19.144
  TOP w0.152: R1148.1@-10.21,19.304 -9.724,19.304 -9.565,19.144 U1105.C1@-9.552,19.144
NetR1151_1: R1151.1 U1105.C3 | length 0.8
  TOP w0.152: R1151.1@-10.134,18.009 -9.835,18.009 -9.552,18.292 U1105.C3@-9.552,18.439
NetR1401_2: R1401.2 U1400.2 | length 1.3
  TOP w0.1: R1401.2@27.203,6.507 27.207,6.51 27.207,7.815 U1400.2@27.211,7.819
NetR1402_2: R1402.2 U1400.30 | length 4.5
  TOP w0.102: U1400.30@26.01,9.52 25.395,9.52 25.146,9.271 25.146,6.958 25.597,6.507 R1402.2@26.162,6.507
  TOP w0.2: U1400.30@25.983,9.547 U1400.30@26.01,9.52
NetR1404_2: R1404.2 U1400.5 | length 1.3
  TOP w0.102: R1404.2@28.702,6.507 28.711,6.515 U1400.5@28.711,7.819
NetR1406_2: R1406.2 U1400.6 | length 1.5
  TOP w0.102: U1400.6@29.211,7.819 29.211,7.238 29.566,6.883 R1406.2@29.566,6.507
NetR1500_1: R1500.1 U1500.13 | length 1.2
  TOP w0.152: U1500.13@-8.715,30.963 -8.693,30.984 -8.259,30.984 -8.005,31.238 -7.669,31.238 R1500.1@-7.665,31.242
NetR1501_1: R1501.1 U1501.13 | length 3.7
  TOP w0.152: R1501.1@-18.154,32.08 -18.154,34.856 -17.958,35.052 U1501.13@-17.328,35.052
NetSW700_1: SW700.1 SW700.2 U705.2 | length 19.3
  TOP w0.076: U705.2@18.954,23.856 19.009,23.911 19.009,24.241 19.761,24.994 24.217,24.994 27.076,27.853 27.076,29.489 27.631,30.044 SW700.1@29.252,30.044 29.299,29.997 34.405,29.997 SW700.2@34.452,30.044
NetU1101_3: U1101.3 U1106.2 | length 3.9
  TOP w0.076: U1106.2@-14.822,17.055 U1106.2@-14.859,17.018 -14.822,16.981 -14.785,17.018 -14.478,17.018 -14.402,17.094 -14.402,17.653 -14.554,17.805 -14.554,18.745 -14.199,19.101 -13.606,19.101 U1101.3@-13.25,19.456
PG_C: C1103.1 U1100.6 | length 1.4
  TOP w0.076: U1100.6@-13.25,18.65 -13,18.4 -12.62,18.4 -12.395,18.624 -12.32,18.7 C1103.1@-12.03,18.7
PG_R: C1103.2 R1108.2 U1100.7 | length 3.5
  TOP w0.076: U1100.7@-13.75,18.65 -13.5,18.4 -13.5,18.005 -13.38,17.885 -12.395,17.885 -11.995,17.885 R1108.2@-11.98,17.9 -11.98,18.138 -11.834,18.284 -11.548,18.284 -11.4,18.433 C1103.2@-11.4,18.7
PG_START: TP1110.1 U301.C2 U1100.2 | length 41
  TOP w0.076: v1(-13.75,18.152) v1(-13.75,18.152) ; U301.C2@15.35,20.55 15.6,20.3 16.049,20.299 v1(16.056,20.292)
  DVERT w0.076: v7(-12.175,17.145) -12.175,17.122 -12.04,16.986 v2(-12.04,14.3)
  DHOR w0.076: v1(-13.75,18.152) -13.378,17.78 -13.09,17.78 ; -13.089,17.78 -12.299,17.78 -12.175,17.656 v7(-12.175,17.145) ; v2(-12.04,14.3) -12.005,14.3 -11.935,14.37 -7.321,14.37 -6.842,14.85 -4.995,14.85 -4.598,14.453 -3.094,14.453 -2.697,14.85 4.205,14.85 4.322,14.966 13.106,14.966 13.667,15.527 14.332,15.527 15.282,16.477 15.282,17.249 15.627,17.594 16.286,18.253 16.286,20.062 v1(16.056,20.292)
  BOT w0.076: TP1110.1@-12.7,15.24 -12.163,15.777 -12.163,17.132 v7(-12.175,17.145)
PH1_EN: TP1111.1 U301.A1 U1101.1 | length 41.8
  TOP w0.076: v7(-14.541,19.33) -14.511,19.36 -14.346,19.36 U1101.1@-14.25,19.456 ; v1(15.851,19.151) U301.A1@15.851,19.55
  DVERT w0.076: v7(-14.541,19.33) -14.541,19.305 -14.073,18.838 -14.073,17.8 -14.073,15.06 v2(-14.077,15.056)
  DHOR w0.076: v2(-14.077,15.056) -14.058,15.075 -13.426,15.075 -13.027,14.675 -7.448,14.675 -6.968,15.154 4.079,15.154 4.533,15.608 13.317,15.608 13.541,15.832 14.205,15.832 14.977,16.603 14.977,17.377 15.502,17.902 15.502,18.802 v1(15.851,19.151)
  BOT w0.076: TP1111.1@-17.78,20.32 -16.779,19.319 -16.2,19.319 -14.552,19.319 v7(-14.541,19.33)
PH1_OUT: TP1100.1 U1101.7 U1103.6 | length 4.4
  TOP w0.076: v7(-16.308,20.691) -16.278,20.691 -16,20.413 -16,20.2 -16,19.941 v1(-16.002,19.939) ; U1103.6@-16.011,19.931 v1(-16.002,19.939)
  DHOR w0.076: v1(-16.002,19.939) -15.993,19.948 -13.759,19.948 v1(-13.75,19.956)
  BOT w0.076: v7(-16.308,20.691) -15.936,20.32 TP1100.1@-15.24,20.32
PH2_EN: TP1113.1 U301.B2 U1101.6 | length 40
  TOP w0.076: U1101.6@-13.25,19.956 -12.93,20.276 v7@-12.774,20.276 ; U301.B2@15.35,20.05 15.601,19.799 16.049,19.799 v1(16.056,19.792)
  DVERT w0.076: -12.714,15.264 -12.714,20.306 v7(-12.7,20.32) ; -12.713,15.264 -12.713,14.463 v2(-12.71,14.459)
  DHOR w0.076: v2(-12.71,14.459) -12.675,14.459 -12.612,14.523 -7.385,14.523 -6.905,15.002 -4.932,15.002 -4.535,14.605 -3.157,14.605 -2.76,15.002 4.142,15.002 4.259,15.118 13.043,15.118 13.604,15.679 14.268,15.679 15.129,16.54 15.129,17.312 16.069,18.252 16.069,19.779 v1(16.056,19.792)
PH2_OUT: TP1101.1 U1104.6 U1106.4 | length 6
  TOP w0.076: U1104.6@-16,18.625 -16,18.658 v7(-15.684,18.974) -14.968,18.974 -14.732,18.737 -14.732,17.959 -14.988,17.704 -15.352,17.704 -15.543,17.513 -15.543,17.384 U1106.4@-15.559,17.368
  BOT w0.076: TP1101.1@-17.78,17.78 -16.878,17.78 v7(-15.684,18.974)
PULSE_GUARD: TP1114.1 U1100.5 U1101.2 U1101.5 | length 8
  TOP w0.102: U1101.2@-13.75,19.456 -13.5,19.706 -13,19.706 U1101.5@-12.75,19.956 -12.533,19.956 -12.395,19.819 -12.37,19.793 -12.37,19.03 -12.395,19.005 U1100.5@-12.75,18.65 -13.074,18.974 v7(-13.081,18.974)
  BOT w0.076: v7(-13.081,18.974) -13.667,19.559 -13.667,21.893 -12.852,22.708 -12.776,22.708 -12.7,22.784 TP1114.1@-12.7,22.86
RC2_VC: C802.2 R803.2 TP803.1 U802.2 U802.5 | length 6.1
  TOP w0.102: U802.5@13.266,11.379 U802.2@14.166,11.379 14.503,11.379 14.707,11.582 14.707,12.751 14.928,12.973 C802.2@15.367,12.973 ; C802.2@15.368,12.973 v7(15.368,13.416) R803.2@15.368,13.767
  BOT w0.102: TP803.1@15.24,15.24 15.24,13.565 15.368,13.437 v7(15.368,13.416)
SINK_CH1: U900.10 U1501.12 U1504.6 | length 26.4
  TOP w0.152: v1(-17.958,36.855) -17.958,35.662 -17.848,35.552 v1(-17.328,35.552) ; v1(-17.12,36.855) -17.12,38.652 -16.916,38.855 U1504.6@-16.682,38.855
  DVERT w0.152: v4(-17.023,35.225) v2(-17.023,35.556) ; v4(-0.877,31.645) v2(-0.877,31.976)
  AVERT w0.152: v4(-17.023,35.225) -17.023,32.983 -17.137,32.869 -17.137,32.388 -17.018,32.269 v8(-17.018,31.877) ; v4(-0.877,31.645) v8(-0.877,32.046)
  DHOR w0.152: v1(-17.958,36.855) v1(-17.12,36.855) ; v1(-17.328,35.552) -17.326,35.554 -17.027,35.554 v2@-17.025,35.556 ; v1(-1.182,31.972) v1(-1.182,31.972) -0.881,31.974 v2@-0.879,31.976
  AHOR w0.152: v8(-17.018,31.877) -1.068,31.877 -0.899,32.046 v8(-0.877,32.046)
SINK_CH2: U900.12 U1501.5 U1503.6 | length 19.4
  TOP w0.152: v1(-13.558,36.052) -12.709,36.052 -12.573,35.916 -12.573,35.585 -12.567,35.58 U1503.6@-12.567,35.578
  DVERT w0.152: v4(-13.253,35.725) v2(-13.253,36.056) ; v2(-0.877,32.776) -0.877,32.762 -0.788,32.673 v4(-0.788,32.372)
  AVERT w0.152: v4(-13.253,35.725) -13.241,35.738 -13.241,36.115 v8(-13.228,36.127) ; v4(-0.788,32.372) -0.772,32.388 -0.772,36.058 v8(-0.762,36.068)
  DHOR w0.152: v1(-13.558,36.052) -13.556,36.054 -13.257,36.054 v2(-13.253,36.056) ; v1(-1.182,32.772) -1.18,32.774 -0.881,32.774 v2@-0.879,32.776
  AHOR w0.152: v8(-13.228,36.127) -13.224,36.123 -1.168,36.123 -1.113,36.068 v8(-0.762,36.068)
SINK_CH3: U900.13 U1501.2 U1503.3 | length 15.9
  TOP w0.152: U1501.2@-13.558,34.552 -13.358,34.552 -12.949,34.961 -11.98,34.961 -11.891,34.872 -11.891,34.702 U1503.3@-11.867,34.678
  DVERT w0.152: v4(-11.812,34.632) v2(-11.812,34.963) ; v4(-1.096,33.064) v2(-1.096,33.395)
  AVERT w0.152: v8(-11.815,33.858) -11.814,33.86 -11.814,34.631 v4(-11.812,34.632) ; v4(-1.096,33.064) -1.096,33.828 v8(-1.087,33.837)
  DHOR w0.152: v1(-12.394,34.953) -12.389,34.958 -11.819,34.958 v2@-11.814,34.963 ; v1(-1.401,33.391) -1.399,33.393 -1.099,33.393 v2@-1.097,33.395
  AHOR w0.152: v8(-11.815,33.858) -11.805,33.848 -1.097,33.848 v8(-1.087,33.837)
SINK_CH4: U900.9 U1500.14 U1502.6 | length 14.5
  DVERT w0.152: v4(-9.02,31.136) v2(-9.02,31.467) ; v4(-6.74,28.535) v2(-6.74,28.866) ; v4(-1.487,31.245) v2(-1.487,31.576)
  AVERT w0.152: v4(-9.02,31.136) -9.02,28.931 v8(-9.016,28.927) ; v4(-6.74,28.535) v8(-6.739,28.913) ; v4(-1.487,31.245) -1.487,31.19 -1.395,31.097 v8(-1.395,28.905)
  DHOR w0.152: v2(-9.02,31.467) -9.017,31.465 -8.717,31.465 v1(-8.715,31.463) ; v1(-7.045,28.862) -7.043,28.864 -6.743,28.864 v2@-6.741,28.866 ; v2@-1.486,31.576 -1.484,31.574 -1.184,31.574 v1(-1.182,31.572)
  AHOR w0.152: v8(-9.016,28.927) -9.009,28.92 -6.745,28.92 v8(-6.739,28.913) -1.403,28.913 v8(-1.395,28.905)
SINK_ENCL: U901.11 U1500.12 U1502.3 | length 6.2
  TOP w0.152: v1(-8.715,30.463) -8.239,30.463 -8.103,30.326 -8.103,29.892 -7.997,29.787 -7.77,29.787 U1502.3@-7.745,29.762
  DVERT w0.152: v2(-8.41,30.459) v4(-8.41,30.789) ; v4(-5.918,31.652) v2(-5.918,31.983)
  AVERT w0.152: v4@-8.41,30.775 v4(-8.41,30.789) -8.41,30.795 -8.448,30.833 -8.409,30.872 -8.409,31.164 v8(-8.407,31.166) ; v8(-5.935,31.178) -5.927,31.186 -5.927,31.644 v4(-5.918,31.652)
  DHOR w0.152: v1(-8.715,30.463) -8.713,30.461 v2@-8.414,30.461 ; v2@-5.917,31.983 -5.915,31.981 -5.615,31.981 v1(-5.613,31.979)
  AHOR w0.152: v8(-8.407,31.166) -8.401,31.172 -5.941,31.172 v8(-5.935,31.178)
SNK1: U301.B9 U1504.2 | length 48.6
  TOP w0.076: v1(11.592,19.344) 11.599,19.351 11.599,19.799 U301.B9@11.85,20.05
  DVERT w0.076: v2(5.893,38.1) 6.253,37.74 6.253,34.092 6.634,33.711 6.634,33.231 6.349,32.947 6.349,30.437 6.696,30.09 6.696,29.357 6.644,29.304 6.644,18.802 v2(6.853,18.593)
  DHOR w0.076: v1(-16.332,37.953) -16.145,38.14 -5.163,38.14 -5.143,38.12 5.873,38.12 v2(5.893,38.1) ; v2(6.853,18.593) 6.858,18.593 6.96,18.491 11.071,18.491 11.592,19.013 v1(11.592,19.344)
SNK2: U301.C8 U1503.2 | length 39.5
  TOP w0.076: U301.C8@12.35,20.55 v1(12.352,20.55) U301.C8@12.355,20.55
  DVERT w0.076: v2(10.338,35.052) 10.338,25.8 10.338,22.23 10.92,21.649 11.544,21.649 11.783,21.409 11.783,20.753 11.977,20.559 12.395,20.559 v2(12.585,20.748)
  DHOR w0.076: v1(-12.217,34.678) -11.303,34.678 -11.133,34.849 -7.72,34.849 -7.405,34.534 7.805,34.534 8.323,35.052 v2(10.338,35.052) ; v1@12.353,20.551 12.37,20.551 12.568,20.748 v2(12.585,20.748)
SNK3: U301.B8 U1503.5 | length 42.1
  TOP w0.076: v1(12.092,19.344) 12.099,19.351 12.099,19.799 U301.B8@12.35,20.05
  DVERT w0.076: v2(5.852,19.508) 5.852,24.272 5.454,24.67 5.454,25.849 5.893,26.288 5.893,28.511 5.626,28.777 5.626,29.435 5.761,29.569 5.761,30.037 6.197,30.473 6.197,33.135 6.1,33.231 6.1,35.132 v2(5.953,35.28)
  DHOR w0.076: v1(-12.217,35.578) -11.919,35.28 v2(5.953,35.28) ; v2(5.852,19.508) 5.876,19.484 5.971,19.484 5.973,19.482 10.282,19.482 10.423,19.623 11.814,19.623 v1(12.092,19.344)
SNK4: U301.A8 U1502.2 | length 33.5
  TOP w0.076: v1(12.35,19.151) U301.A8@12.35,19.55
  DVERT w0.076: v2(5.99,29.961) 5.99,29.538 6.286,29.241 6.286,18.351 v2(6.299,18.339)
  DHOR w0.076: v1(-7.395,29.762) -7.395,29.794 -7.209,29.979 -6.605,29.979 -6.374,29.748 -3.092,29.748 -2.835,30.005 -0.821,30.005 -0.456,29.641 4.876,29.641 5.161,29.926 5.673,29.926 5.736,29.862 5.857,29.862 5.956,29.961 v2(5.99,29.961) ; v2(6.299,18.339) 6.299,17.995 6.438,17.856 11.624,17.856 12.35,18.582 v1(12.35,19.151)
SNK5: U301.A7 U1502.5 | length 32.7
  TOP w0.076: v1(12.85,19.151) U301.A7@12.85,19.55
  DVERT w0.076: v2(6.071,28.633) 6.083,28.621 6.083,17.869 v2(6.096,17.856)
  DHOR w0.076: v1(-7.395,28.862) -7.11,29.146 -4.146,29.146 -4.002,29.291 -3.507,29.291 -3.363,29.146 -1.507,29.146 -1.33,28.969 5.537,28.969 5.855,28.652 6.052,28.652 v2(6.071,28.633) ; v2(6.096,17.856) 6.249,17.704 11.688,17.704 12.85,18.866 v1(12.85,19.151)
SPI1.BLE_CSn: U301.G12 U400.F6 | length 26.8
  TOP w0.076: v1(9.951,22.55) U301.G12@10.35,22.55
  DVERT w0.076: v2(7.356,23.343) 7.361,23.347 7.361,23.491 7.976,24.105 7.976,30.667 7.663,30.98 7.663,32.176 7.889,32.402 7.889,35.12 7.782,35.227 7.782,39.086 v2(7.796,39.1)
  DHOR w0.076: v2(7.356,23.343) 7.651,23.637 9.008,23.637 9.6,23.044 9.946,22.698 9.946,22.555 v1(9.951,22.55) ; v2(7.796,39.1) 11.516,39.1 12.082,38.534 13.478,38.534 13.586,38.534 v1(14.152,37.968)
SPI1.FRAM_CSn: U300.1 U301.L3 | length 6.6
  TOP w0.076: U301.L3@14.85,24.55 15.099,24.799 15.099,25.8 15.099,25.826 15.011,25.914 15.011,30.212 15.287,30.487 U300.1@15.652,30.487
SPI1.MISO: U300.2 U301.L2 U400.E5 | length 15.5
  TOP w0.076: U400.E5@14.553,38.368 U400.E5@14.553,38.368 14.753,38.165 v1(14.753,38.163) ; U301.L2@15.35,24.55 15.6,24.8 15.6,25.564 15.212,25.952 15.212,29.762 15.286,29.837 v1(15.652,29.837)
  DVERT w0.076: v2(14.881,37.829) 14.911,37.829 15.072,37.668 16.01,36.729 v2(16.01,29.82)
  DHOR w0.076: v1(14.753,38.163) 14.753,38.129 14.857,38.024 14.857,37.853 v2(14.881,37.829) ; v1(15.652,29.837) 15.66,29.828 16.001,29.828 v2(16.01,29.82)
SPI1.MOSI: U300.5 U301.K3 U400.E6 | length 19.9
  TOP w0.076: U400.E6@14.553,37.968 14.553,37.656 14.561,37.656 14.65,37.568 v1(14.684,37.568) ; U301.K3@14.91,24.09 15.123,24.303 15.244,24.303 15.247,24.301 15.453,24.301 15.456,24.303 15.744,24.303 15.747,24.301 15.985,24.301 16.308,24.623 16.308,27.61 17.225,28.527 U300.5@18.451,28.527 ; v1(18.522,28.527) U300.5@18.522,28.537
  DVERT w0.076: v2(17.6,36.572) 18.068,36.105 18.068,28.543 v2(18.052,28.527)
  DHOR w0.076: v1(14.684,37.568) 14.684,37.132 15.088,36.728 15.239,36.577 v2@17.595,36.577 ; v2(18.052,28.527) v1(18.522,28.527)
SPI1.SCK: U300.6 U301.M1 U400.D6 | length 17.3
  TOP w0.076: U400.D6@14.953,37.968 14.953,37.37 v1(14.955,37.367) ; U301.M1@15.85,25.05 16.108,25.308 16.108,27.71 17.575,29.177 v1(18.522,29.177) U300.6@18.522,29.187
  DVERT w0.076: v2(17.526,36.932) 17.551,36.932 18.295,36.188 18.295,29.439 v2(18.298,29.436)
  DHOR w0.076: v1(14.955,37.367) 15.16,37.162 15.391,36.932 v2(17.526,36.932) ; v2(18.298,29.436) 18.298,29.419 18.522,29.195 v1(18.522,29.177)
SRC1: Q1102.1 U301.C9 | length 39.3
  TOP w0.076: v1(-19.126,27.788) -18.912,28.002 Q1102.1@-18.724,28.002 ; U301.C9@11.85,20.546 v1(11.85,20.548) U301.C9@11.85,20.55
  DVERT w0.076: v2(10.63,27.393) 10.63,27.367 10.491,27.227 10.491,25.8 10.491,22.294 10.983,21.801 11.607,21.801 11.935,21.473 11.935,20.883 12.044,20.775 v2(12.066,20.775)
  DHOR w0.076: v1(-19.126,27.788) -18.569,27.231 -9.184,27.231 -8.699,27.716 -7.396,27.716 -6.689,27.009 0.067,27.009 0.564,27.505 1.043,27.505 ; 1.044,27.504 7.568,27.504 7.782,27.29 10.522,27.29 10.625,27.393 v2(10.63,27.393) ; v1@11.851,20.549 11.851,20.554 12.064,20.768 v2@12.064,20.773
SRC2: Q1103.1 U301.A9 | length 42.5
  TOP w0.076: v1(11.85,19.151) U301.A9@11.85,19.55
  DVERT w0.076: v2(6.48,29.446) 6.491,29.435 6.491,18.604 v2(6.502,18.593)
  DHOR w0.076: v1(-18.733,29.726) -18.507,29.5 -6.7,29.5 -6.612,29.588 -2.997,29.588 -2.898,29.488 6.372,29.488 6.39,29.47 6.456,29.47 v2(6.48,29.446) ; v2(6.502,18.593) 6.518,18.593 6.772,18.339 11.134,18.339 11.826,19.031 11.826,19.124 v1@11.85,19.148
STIM1: Q1100.6 U1500.2 U1500.7 | length 9.6
  TOP w0.203: Q1100.6@-15.149,27.902 -15.149,27.678 -15.03,27.559 -14.28,27.559 -13.346,28.493 v1(-12.2,28.493) -11.19,28.493 -11.1,28.582 U1500.7@-11.1,29.078
  DVERT w0.203: v4(-12.18,31.136) v2(-12.18,31.467) ; v2(-11.895,28.496) -11.876,28.477 -11.876,28.181 v4(-11.857,28.162)
  AVERT w0.203: v4(-12.18,31.136) -12.18,30.706 -11.848,30.374 v4@-11.848,28.171
  DHOR w0.203: v1(-12.485,31.463) -12.483,31.465 -12.184,31.465 v2@-12.182,31.467 ; v1(-12.2,28.493) -12.198,28.494 -11.899,28.494 v2@-11.897,28.496
STIM2: Q1101.6 U1500.5 U1500.20 | length 7.5
  TOP w0.203: Q1101.6@-15.158,29.626 -15.158,29.456 -15.039,29.337 -14.3,29.337 -13.675,29.963 -13.385,29.963 ; U1500.5@-12.485,29.963 -13.385,29.963 ; U1500.20@-11.6,32.848 -12.822,32.848 -13.385,32.284 -13.385,29.963
STIM_EN: TP1108.1 U301.B3 U1105.B2 | length 33.7
  TOP w0.076: v1(-8.001,16.332) -8.001,18.817 v7(-7.813,19.006) ; v1(14.592,19.344) 14.599,19.351 14.599,19.799 U301.B3@14.85,20.05
  DHOR w0.076: v1(-9.202,18.789) -8.981,19.01 -7.817,19.01 v7(-7.813,19.006) ; v1(-8.001,16.332) -3.541,16.332 -3.372,16.163 0.332,16.163 0.656,16.488 2.352,16.488 3.068,17.204 5.174,17.204 5.785,16.592 10.798,16.592 11.134,16.256 13.029,16.256 13.716,16.943 13.716,17.571 13.756,17.61 13.756,17.861 14.592,18.698 v1(14.592,19.344)
  BOT w0.076: TP1108.1@-10.16,17.78 -8.763,19.177 -8.018,19.177 -7.847,19.006 v7(-7.813,19.006)
STIM_SEL.CH1: R1508.2 U1501.9 U1504.3 | length 1.8
  TOP w0.076: U1501.9@-15.943,36.937 -15.982,36.976 U1504.3@-15.982,37.955 R1508.2@-15.245,37.955
STIM_SEL.CH1n: U301.D7 U1504.5 | length 49.1
  TOP w0.076: U301.D7@12.85,21.05 12.85,21.052 13.208,21.41 v1(13.208,21.412)
  DVERT w0.076: v2(14.264,25.95) 14.264,25.984 14.198,26.05 14.198,31.121 14.58,31.503 v2(14.58,36.576)
  DHOR w0.076: v1(-16.332,38.855) -15.538,39.649 5.347,39.649 6.132,38.865 9.145,38.865 9.827,38.865 11.173,38.865 11.684,38.354 12.802,38.354 13.478,37.678 13.488,37.668 v2(14.58,36.576) ; v1(13.208,21.412) 13.525,21.412 13.882,21.77 13.882,23.331 13.792,23.421 13.792,25.479 v2(14.264,25.95)
STIM_SEL.CH2: R1507.2 U1501.8 U1507.6 | length 6.9
  TOP w0.076: v1(-15.443,36.871) U1501.8@-15.443,36.937
  TOP w0.102: R1507.2@-16.533,31.642 -16.256,31.642 -16.136,31.523 v1(-16.136,31.506) -16.134,31.504 -15.819,31.504 U1507.6@-15.817,31.502
  DVERT w0.076: v2(-15.819,31.499) -15.819,34.153 -15.779,34.193 v2(-15.779,36.871)
  DHOR w0.076: v1(-16.136,31.506) -16.133,31.503 -15.823,31.503 v2(-15.819,31.499) ; v2(-15.779,36.871) v1(-15.443,36.871)
STIM_SEL.CH2n: U301.L12 U1507.2 | length 33.6
  TOP w0.076: v1(9.951,24.55) U301.L12@10.35,24.55
  DVERT w0.076: v2(-15.225,31.858) -15.225,26.445 -14.88,26.1 -14.88,24.854 v2(-14.9,24.834)
  DHOR w0.076: v2(-15.225,31.858) -15.222,31.855 -14.92,31.855 v1(-14.917,31.852) ; v2(-14.9,24.834) -2.971,24.834 -2.793,25.012 -2.355,25.012 -1.829,24.486 2.552,24.486 3.015,24.95 4.584,24.95 5.053,24.481 6.847,24.481 7.08,24.714 9.511,24.714 9.6,24.625 9.663,24.562 9.939,24.562 v1(9.951,24.55)
STIM_SEL.CH3: R1506.2 U1501.19 U1507.3 | length 1.7
  TOP w0.102: U1501.19@-14.943,33.167 -14.93,33.154 -14.93,32.215 U1507.3@-14.917,32.202 R1506.2@-14.199,32.202
STIM_SEL.CH3n: U301.J10 U1507.5 | length 35.8
  DVERT w0.076: v2(11.4,31.157) 11.4,29.604 11.467,29.537 11.728,29.275 11.728,28.935 11.728,28.766 11.379,28.417 11.379,25.8 11.379,23.964 v2(11.566,23.777)
  DHOR w0.076: v1(-15.819,31.852) -15.214,31.247 -1.032,31.247 -0.853,31.067 8.008,31.067 8.329,31.389 9.028,31.389 9.276,31.14 11.384,31.14 v2(11.4,31.157) ; v1(11.35,23.55) 11.351,23.556 11.564,23.77 v2@11.564,23.775
STIM_SEL.CH4: R1503.2 U1500.17 U1505.6 | length 2.9
  TOP w0.102: U1500.17@-10.1,32.848 -10.1,33.356 -10.541,33.797 -10.541,34.452 -10.43,34.563 -10.222,34.563 U1505.6@-10.218,34.558 -9.955,34.558 -9.822,34.425 -9.584,34.425 R1503.2@-9.576,34.418
STIM_SEL.CH4n: U301.M12 U1505.2 | length 33.3
  TOP w0.076: v1(9.951,25.05) U301.M12@10.35,25.05
  DVERT w0.076: v2(-12.4,25.369) -12.4,29.408 -11.85,29.958 -11.85,33.845 v2(-11.49,34.206)
  DHOR w0.076: v2(-12.4,25.369) -12.395,25.375 -9.081,25.375 -8.788,25.668 -7.118,25.668 -6.818,25.368 -1.276,25.368 -0.775,24.867 2.429,24.867 2.868,25.306 4.731,25.306 5.201,24.836 6.699,24.836 6.933,25.07 9.6,25.07 9.931,25.07 v1(9.951,25.05) ; v2(-11.49,34.206) v2(-11.49,34.206) -11.119,34.207 v1(-11.118,34.208)
STIM_SEL.ENCL: R1504.2 U1500.9 U1506.3 | length 1.8
  TOP w0.102: U1500.9@-10.1,29.078 -10.135,29.078 -10.116,29.059 U1506.3@-10.116,28.163 -9.518,28.163 R1504.2@-9.433,28.248 ; R1504.2@-9.433,28.263 R1504.2@-9.433,28.248 ; R1504.2@-9.431,28.164 -9.433,28.166 R1504.2@-9.433,28.248
STIM_SEL.ENCLn: U301.J11 U1506.5 | length 27.2
  TOP w0.076: v1(10.142,23.306) 10.147,23.301 10.592,23.301 10.841,23.55 U301.J11@10.85,23.55
  DVERT w0.076: v2(-11.273,27.525) -11.267,27.519 -11.267,23.807 v2(-11.26,23.8)
  DHOR w0.076: v2(-11.273,27.525) -11.273,27.542 -11.018,27.796 v1(-11.018,27.813) ; v2(-11.26,23.8) -6.665,23.8 -6.478,23.612 -6.478,23.443 -6.32,23.286 6.729,23.286 7.396,23.952 9.195,23.952 9.6,23.547 9.841,23.306 v1(10.142,23.306)
STIMA: TP1500.1 U901.16 U1500.1 U1500.10 U1501.7 U1501.10 | length 29.6
  TOP w0.152: U901.16@-4.153,30.963 -4.123,30.933 v7(-3.696,30.933)
  TOP w0.203: U1501.7@-14.943,36.937 -14.943,37.381 -14.808,37.516 v1(-13.868,37.516)
  DVERT w0.203: v4(-16.138,36.529) v2(-16.138,36.859) ; v4(-13.617,37.175) -13.597,37.194 -13.597,37.486 v2(-13.563,37.52) ; v4(-12.98,31.636) v2(-12.98,31.967) ; v4(-9.295,28.751) v2(-9.295,29.082)
  AVERT w0.203: v4(-16.138,36.529) -16.135,36.532 -16.135,36.867 v8(-16.131,36.871) ; v4(-13.617,37.175) -13.6,37.158 v8(-13.6,36.834) -13.598,36.832 -13.598,32.75 -12.98,32.131 v4(-12.98,31.636) ; v8(-12.979,29.083) v4@-12.979,31.49 ; v4(-9.295,28.751) v2(-9.295,29.082) ; v8(-3.917,29.262) -3.917,30.374 -3.715,30.576 -3.715,30.914 v7(-3.696,30.933)
  DHOR w0.203: v1(-16.443,36.855) -16.441,36.857 -16.142,36.857 v2(-16.138,36.859) ; v1(-13.868,37.516) -13.866,37.518 -13.567,37.518 v2(-13.563,37.52) ; v2@-12.976,31.965 -12.677,31.965 v1(-12.675,31.963) ; v1(-9.6,29.078) -9.598,29.08 v2@-9.299,29.08
  AHOR w0.203: v8(-16.131,36.871) -13.637,36.871 v8(-13.6,36.834) ; v8(-12.979,29.083) -9.297,29.083 v2(-9.295,29.082) -9.114,29.262 v8(-3.917,29.262)
  BOT w0.152: TP1500.1@-5.08,33.02 -3.696,31.636 v7(-3.696,30.933)
  other v8: -9.295,29.082
STIMA_SEL: R1502.2 U1500.19 U1505.3 | length 1.8
  TOP w0.102: R1502.2@-11.861,33.858 U1505.3@-11.118,33.858 -11.118,32.865 U1500.19@-11.1,32.848
STIMA_SELn: U301.J12 U1505.5 | length 31.7
  TOP w0.076: v1(9.951,23.55) U301.J12@10.35,23.55
  DVERT w0.076: v2(-9.828,34.212) -9.614,33.997 -9.614,28.367 -9.474,28.227 -9.474,27 -9.594,26.88 -9.594,24.023 v2(-9.601,24.016)
  DHOR w0.076: v1(-10.218,34.208) -10.216,34.21 -9.83,34.21 v2(-9.828,34.212) ; v2(-9.601,24.016) -9.567,24.016 -9.503,23.952 -6.789,23.952 -6.517,24.224 -6.271,24.224 -5.485,23.438 6.666,23.438 7.333,24.105 9.258,24.105 9.6,23.763 9.805,23.557 9.943,23.557 v1(9.951,23.55)